# Altium PCB MiniRobot.PcbDoc
Units mm, origin at the board's own origin, x right, y up, seen from the top; angles counter-clockwise.
Board outline 90 x 85 mm, 2 copper layers (Top Layer, Bottom Layer); 54 components, 47 nets, 197 pads, 4 vias.
Unrouted connection lines stored in the file: 115.
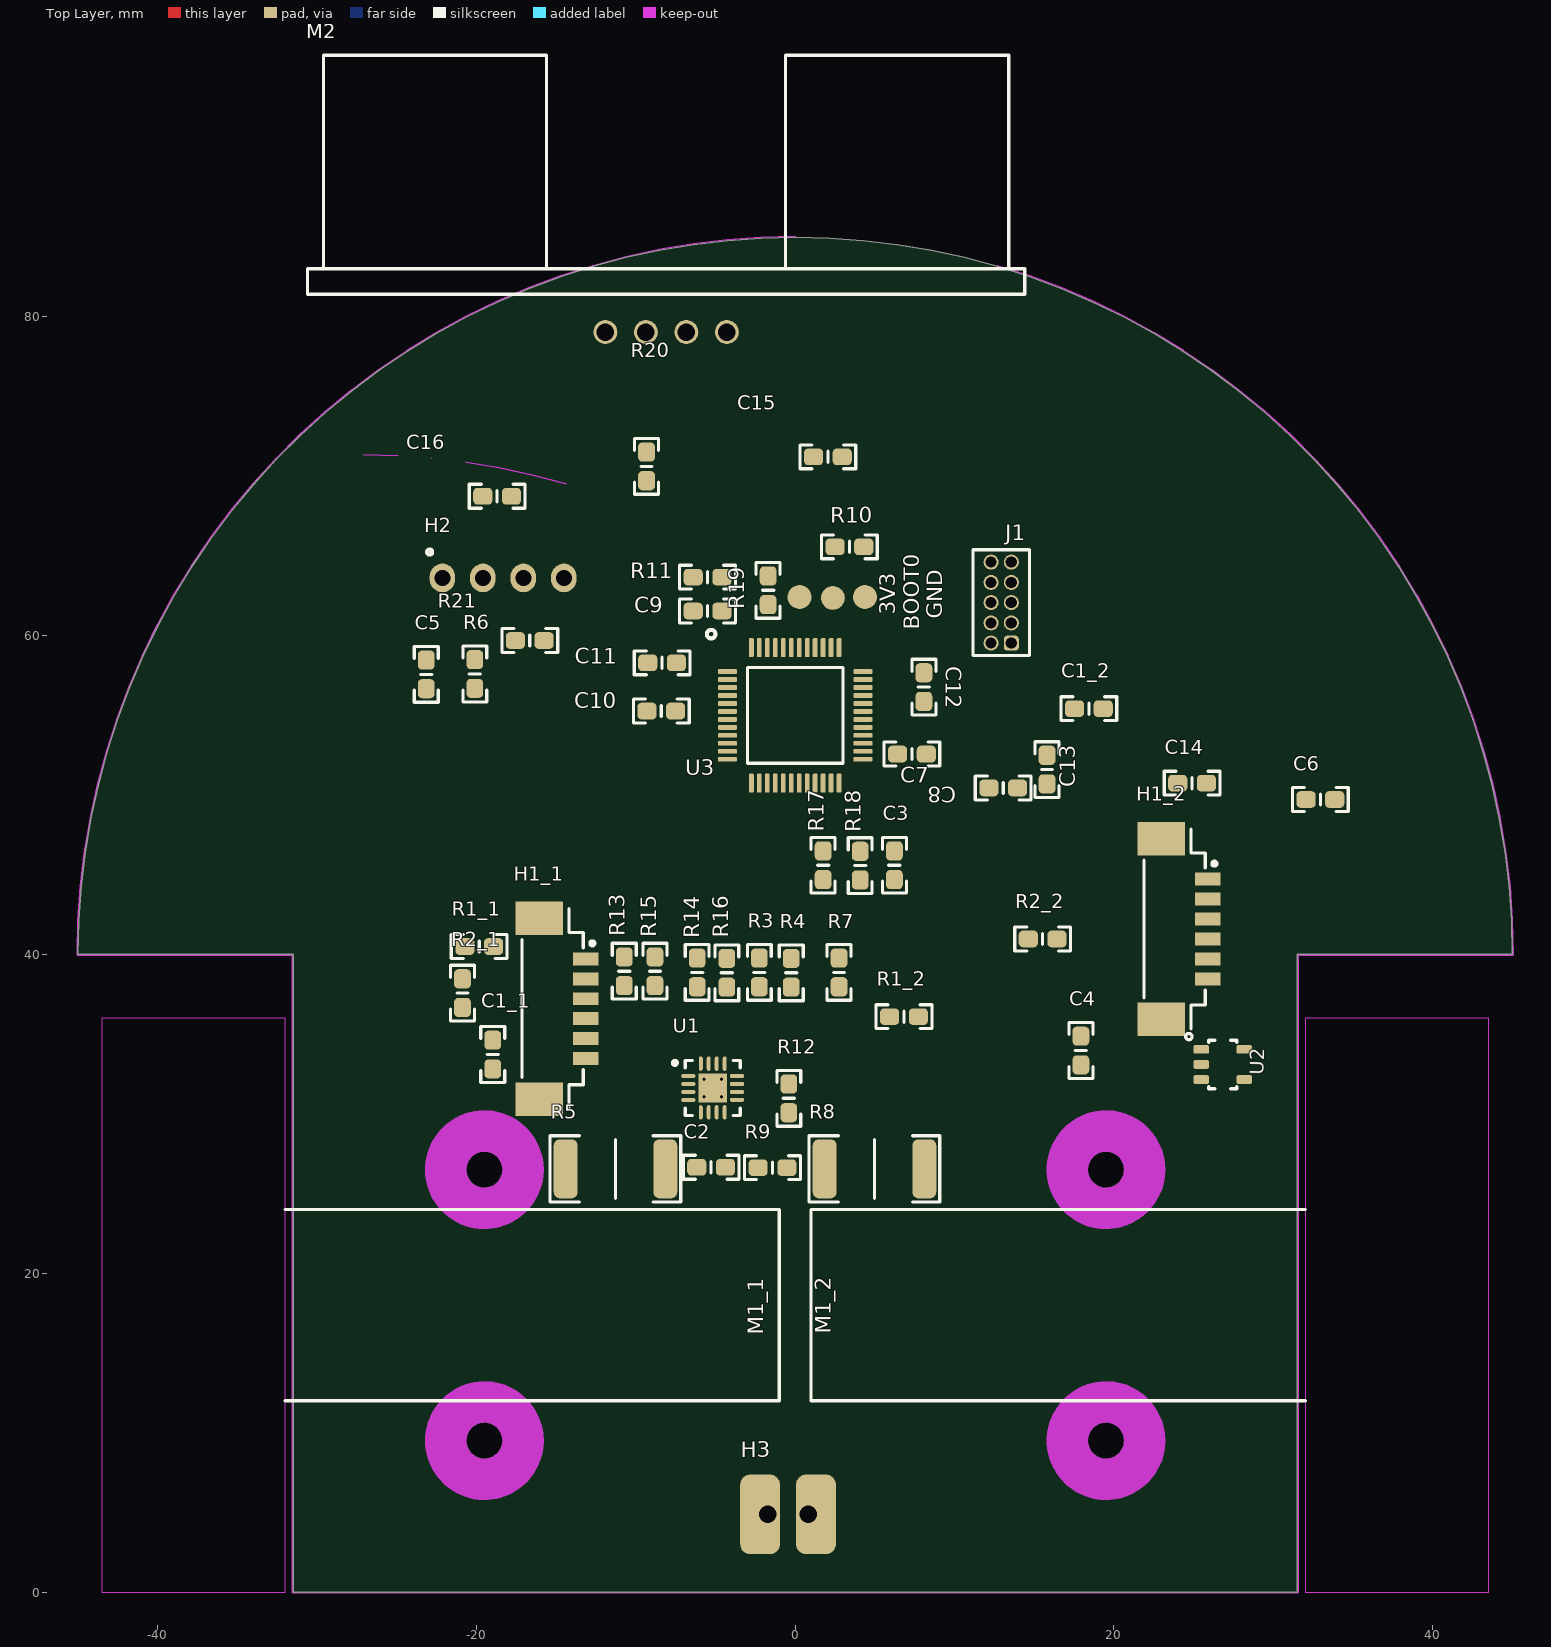
[diagram p0: Top Layer view]
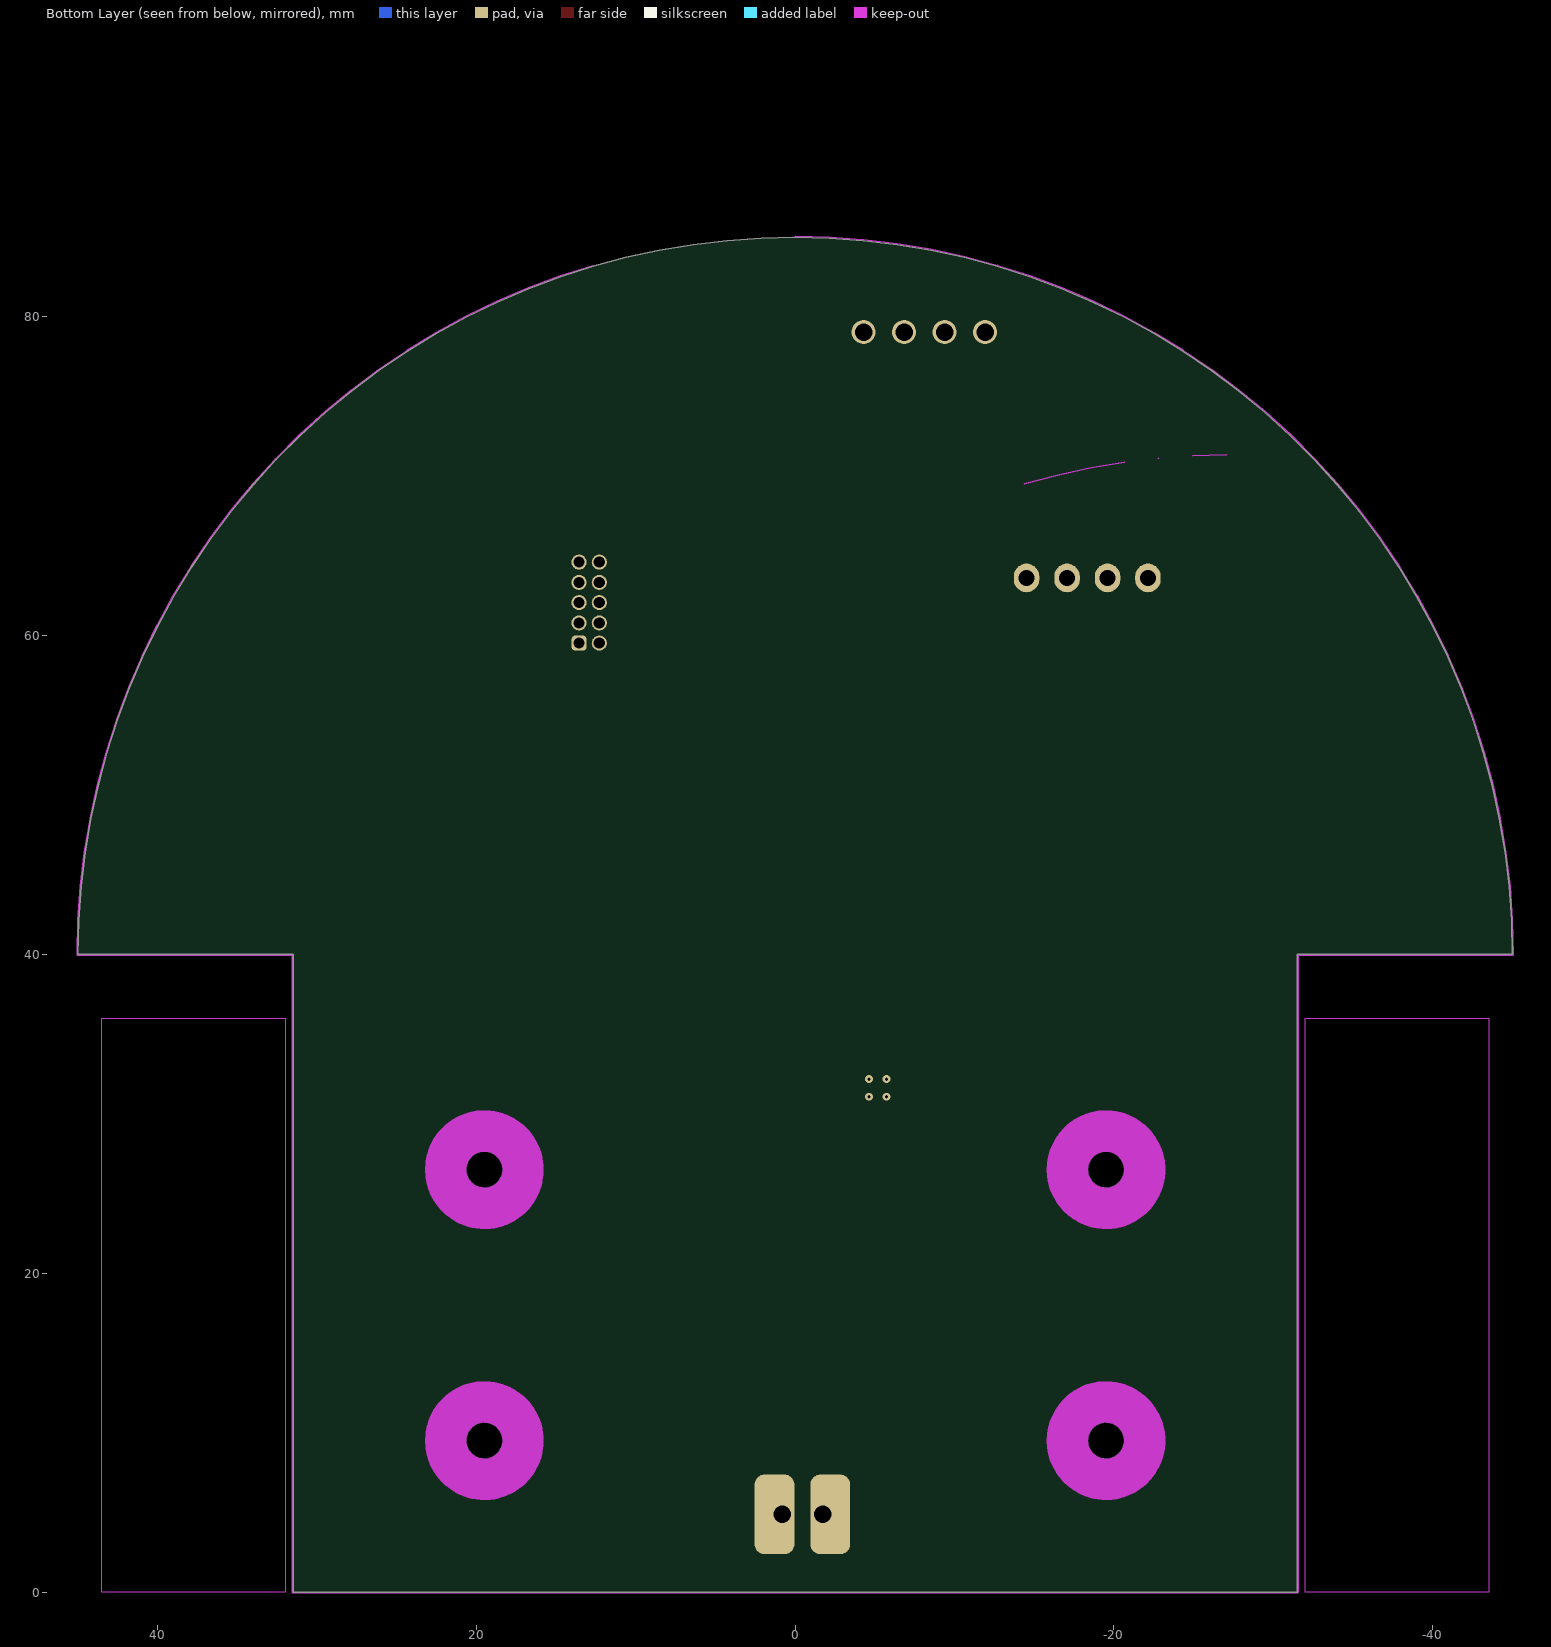
[diagram p1: Bottom Layer view, seen from below]

## Layer stack, top to bottom
Top Solder: solder mask 0.0102, Solder Resist, Dk 3.5
Top Layer: signal copper 0.0356
Dielectric 1: dielectric 0.32, FR-4, Dk 4.8
Bottom Layer: signal copper 0.0356
Bottom Solder: solder mask 0.0102, Solder Resist, Dk 3.5

## Board outline
45,40 44.949,42.141 44.796,44.278 44.542,46.404 44.187,48.516 43.732,50.609 43.177,52.678 42.525,54.718 41.777,56.725 40.933,58.694 39.998,60.62 38.971,62.5 37.856,64.329 36.656,66.103 35.372,67.817 34.009,69.469 32.568,71.054 31.054,72.568 29.469,74.009 27.817,75.372 26.103,76.656 24.329,77.856 22.5,78.971 20.62,79.998 18.694,80.933 16.725,81.777 14.718,82.525 12.678,83.177 10.609,83.732 8.516,84.187 6.404,84.542 4.278,84.796 2.141,84.949 0,85 -2.141,84.949 -4.278,84.796 -6.404,84.542 -8.516,84.187 -10.609,83.732 -12.678,83.177 -14.718,82.525 -16.725,81.777 -18.694,80.933 -20.62,79.998 -22.5,78.971 -24.329,77.856 -26.103,76.656 -27.817,75.372 -29.469,74.009 -31.054,72.568 -32.568,71.054 -34.009,69.469 -35.372,67.817 -36.656,66.103 -37.856,64.329 -38.971,62.5 -39.998,60.62 -40.933,58.694 -41.777,56.725 -42.525,54.718 -43.177,52.678 -43.732,50.609 -44.187,48.516 -44.542,46.404 -44.796,44.278 -44.949,42.141 -45,40 -31.5,40 -31.5,0 31.5,0 31.5,40

## Design rules (kind name [scope] priority, off if disabled: settings)
Clearance [All] p1: gap=0.125
ComponentClearance [All] p1 off: gap=0.254 collisioncheckmode=3 verticalgap=0.254 showdistances=FALSE
HoleSize [All] p1: absolutevalues=TRUE maxlimit=10 minlimit=0.19 maxpercent=80.000 minpercent=20.000
MinimumAnnularRing [All] p1: minimumring=0.076
MinimumSolderMaskSliver [All] p1: minsoldermaskwidth=0.154
PolygonConnect [All] p1: connectstyle=Relief reliefconductorwidth=0.254 reliefentries=4 polygonreliefangle="45 Angle" airgapwidth=0.254
RoutingVias [All] p1: holewidth=0.25 width=0.6 viastyle="Through Hole" minholewidth=0.2 minwidth=0.45 maxholewidth=1 maxwidth=2
SilkToSilkClearance [All] p1: silktosilkclearance=0.154
SilkToSolderMaskClearance [IsPad] p1: minsilkscreentomaskgap=0 clearancetoexposedcopper=TRUE
SolderMaskExpansion SolderMask_Via [IsVia] p1: expansion=-100
SolderMaskExpansion [All] p2: expansion=0.102
Width [All] p1: maxlimit=10 minlimit=0.075 preferedwidth=0.2 minimp=50.000000 maximp=50.000000 favimp=50.000000
24 further rules are at their usual default settings.

## Classes and differential pairs
channel class MR_Motor: LeftMotor RightMotor
component class U_MR_Power: C6 C14 H3 U2
component class RightMotor: C1_2 H1_2 M1_2 R1_2 R2_2
component class LeftMotor: C1_1 H1_1 M1_1 R1_1 R2_1
component class U_MR_Mcu: 3V3 BOOT0 C7 C8 C9 C10 C11 C12 C13 GND J1 R10 R11 R13 R14 R15 R16 R17 R18 R19 U3
component class U_MR_Motor_Control: C2 C3 C4 C5 R3 R4 R5 R6 R7 R8 R9 R12 U1
component class U_MR_RangeSensor: C15 M2 R20
component class U_MR_UartConnector: C16 H2 R21

## Components (designator, comment, footprint, x,y, rotation, side; value= is the part's Value field where it differs from the comment)
3V3 "TestPoint" ROUND_TEST_POINT 0.275,62.425 r180 top
BOOT0 "TestPoint" ROUND_TEST_POINT 2.362,62.375 r270 top
C1_1 "CerCap" 0603_CAP_LD -18.975,33.725 r270 top (schematic designator C1)
C1_2 "CerCap" 0603_CAP_LD 18.425,55.425 r180 top (schematic designator C1)
C2 "CerCap" 0603_CAP_LD -5.275,26.65 r180 top
C3 "CerCap" 0603_CAP_LD 6.225,45.6 r270 top
C4 "CerCap" 0603_CAP_LD 17.925,33.975 r90 top
C5 "CerCap" 0603_CAP_LD -23.15,57.575 r90 top
C6 "CerCap" 0603_CAP_LD 32.95,49.725 r0 top
C7 "CerCap" 0603_CAP_LD 7.325,52.575 r180 top
C8 "CerCap" 0603_CAP_LD 13.05,50.45 r0 top
C9 "CerCap" 0603_CAP_LD -5.5,61.55 r0 top
C10 "CerCap" 0603_CAP_LD -8.4,55.275 r0 top
C11 "CerCap" 0603_CAP_LD -8.35,58.3 r0 top
C12 "CerCap" 0603_CAP_LD 8.075,56.775 r90 top
C13 "CerCap" 0603_CAP_LD 15.8,51.6 r270 top
C14 "CerCap" 0603_CAP_LD 24.9,50.75 r180 top
C15 "CerCap" 0603_CAP_LD 2.05,71.225 r180 top
C16 "CerCap" 0603_CAP_LD -18.7,68.75 r180 top
GND "TestPoint" ROUND_TEST_POINT 4.375,62.425 r90 top
H1_1 "Header" HEADER_1X6_PICOBLADE_653106124022 -15.225,36.6 r270 top (schematic designator H1)
H1_2 "Header" HEADER_1X6_PICOBLADE_653106124022 23.8,41.6 r270 top (schematic designator H1)
H2 "Header" "HE14 1x4 Straight" -18.325,63.625 r0 top
H3 "CustomBatteryConnector" CUSTOMBATTERYCONNECTOR -0.45,4.875 r0 top
J1 "Debug" 62201021121 12.925,62.075 r90 top
M1_1 "MotorGroup" MOTORGROUP -1,18 r0 top locked (schematic designator M1)
M1_2 "MotorGroup" MOTORGROUP 1,18 r180 top locked (schematic designator M1)
M2 "Ultrasonic Range Sensor" HC-SR04 -8.1,79.05 r0 top
R1_1 "Resistor" 0603_RES_LD -19.825,40.5 r0 top (schematic designator R1)
R1_2 "Resistor" 0603_RES_LD 6.825,36.1 r0 top (schematic designator R1)
R2_1 "Resistor" 0603_RES_LD -20.875,37.575 r270 top (schematic designator R2)
R2_2 "Resistor" 0603_RES_LD 15.525,40.975 r0 top (schematic designator R2)
R3 "Resistor" 0603_RES_LD -2.25,38.875 r90 top
R4 "Resistor" 0603_RES_LD -0.25,38.85 r270 top
R5 "Resistor" 2512_RES_LD -11.275,26.55 r180 top
R6 "Resistor" 0603_RES_LD -20.1,57.6 r270 top
R7 "Resistor" 0603_RES_LD 2.75,38.875 r270 top
R8 "Resistor" 2512_RES_LD 4.975,26.55 r180 top
R9 "Resistor" 0603_RES_LD -1.425,26.625 r180 top
R10 "Resistor" 0603_RES_LD 3.4,65.575 r180 top
R11 "Resistor" 0603_RES_LD -5.5,63.675 r0 top
R12 "Resistor" 0603_RES_LD -0.4,30.975 r90 top
R13 "Resistor" 0603_RES_LD -10.725,38.95 r90 top
R14 "Resistor" 0603_RES_LD -6.15,38.875 r90 top
R15 "Resistor" 0603_RES_LD -8.8,38.95 r90 top
R16 "Resistor" 0603_RES_LD -4.29,38.85 r90 top
R17 "Resistor" 0603_RES_LD 1.75,45.6 r90 top
R18 "Resistor" 0603_RES_LD 4.075,45.575 r90 top
R19 "Resistor" 0603_RES_LD -1.7,62.85 r270 top
R20 "Resistor" 0603_RES_LD -9.325,70.625 r90 top
R21 "Resistor" 0603_RES_LD -16.65,59.7 r180 top
U1 "Dual Brush Motor Driver" QFN-STSPIN240 -5.175,31.625 r0 top
U2 "Low noise, Low Iq LDO" LP5907 26.825,33.1 r0 top
U3 "Microcontroller" STM32_LQFP48 0,55 r0 top

## Footprints (in the part's own frame and the unit in brackets; to place one, negate y for a bottom-side part, rotate by r counter-clockwise, add the part's x,y. Pads: shape width x height; smd on the part's side, far side on the other; paste and mask are expansions set on the pad)
0603_CAP_LD [mm] "0603 Capacitor Low Density"
  rrect50% 1.2x1.05 smd: 1(-0.9,0) 2(0.9,0)
  silkscreen extent -1.75,-0.75 1.75,0.75
0603_RES_LD [mm] "0603 Resistor Low Density"
  rrect50% 1.2x1.05 smd: 1(-0.9,0) 2(0.9,0)
  silkscreen extent -1.75,-0.75 1.75,0.75
2512_RES_LD [mm] "2512 Low Density Resistor"
  rrect50% 1.5x3.7 smd: 1(-3.125,0) 2(3.125,0)
  silkscreen extent -4.1,-2.07 4.1,2.07
62201021121 [mm] "Pin Header, pitch 1.27 mm, THT, Vertical, dual row, 10p"
  rrect50% 0.95x0.95 hole 0.7: 1(-2.54,-0.635)
  round 0.95 hole 0.7: 2(-2.54,0.635) 3(-1.27,-0.635) 4(-1.27,0.635) 5(0,-0.635) 6(0,0.635) 7(1.27,-0.635) 8(1.27,0.635) 9(2.54,-0.635) 10(2.54,0.635)
  silkscreen extent -3.32,-1.78 3.32,1.78, body extent -3.17,-1.7 3.18,1.7, height 5.33
CUSTOMBATTERYCONNECTOR [mm] "CustomBatteryConnector"
  rrect50% 2.5x5 smd paste-100: +(-1.75,0) -(1.75,0)
  rrect50% 2.5x5 smd far side paste-100: +(-1.75,0) -(1.75,0)
  round 1.5 hole 1.1 unplated paste-100: +(-1.27,0) -(1.27,0)
HC-SR04 [mm] "HC-SR04"
  round 1.5 hole 1.1 unplated: 1(-3.81,0) 2(-1.27,0) 3(1.27,0) 4(3.81,0)
  silkscreen extent -22.5,2.38 22.5,17.38, body extent -22.73,-0.3 22.72,17.49, height 20
"HE14 1x4 Straight" [mm] "Connector HE14 Straight 1x4"
  oval 1.6x1.8 hole 1 mask+0.102: 1(-3.81,0) 2(-1.27,0) 3(1.27,0) 4(3.81,0)
  silkscreen extent -4.77,1.47 -4.45,1.78, body extent -5.08,-1.27 5.08,1.27, height 9.5
HEADER_1X6_PICOBLADE_653106124022 [mm] "1.25mm SMT Male Vertical Shrouded Header, 6p"
  rect 0.81x1.6 smd: 1(-3.125,2.07) 2(-1.875,2.07) 3(-0.625,2.07) 4(0.625,2.07) 5(1.875,2.07) 6(3.125,2.07)
  rect 2.1x3 smd: ""(-5.675,-0.83) ""(5.675,-0.83)
  silkscreen extent -6.27,-1.92 6.27,2.62
LP5907 [mm] "LP5907 SOT23"
  rrect50% 1x0.55 smd mask+0.102: 1(-1.35,0.95) 2(-1.35,0) 3(-1.35,-0.95) 4(1.35,-0.95) 5(1.35,0.95)
  silkscreen extent -2.33,-1.52 0.88,1.95
MOTORGROUP [mm]
  round 0 hole 2.2 unplated paste+0 mask+0: 21(-18.5,8.5) 22(-18.5,-8.5)
  Keep-Out Layer pour cut-out: -31,-18 -31,18 -42.5,18 -42.5,-18
  Keep-Out Layer circle w2.6: c-18.5,-8.5 r2.425
  Keep-Out Layer circle w2.6: c-18.5,8.5 r2.425
  silkscreen extent -31,-6 0,6
QFN-STSPIN240 [mm] "QFN, 16-Leads, Body 3,00x3,00mm, Pitch 0,50mm, Thermal Pad 1,80x1,80mm, IPC Low Density"
  oval 0.9x0.25 smd: 1(-1.525,0.75) 2(-1.525,0.25) 3(-1.525,-0.25) 4(-1.525,-0.75) 9(1.525,-0.75) 10(1.525,-0.25) 11(1.525,0.25) 12(1.525,0.75)
  oval 0.25x0.9 smd: 5(-0.75,-1.525) 6(-0.25,-1.525) 7(0.25,-1.525) 8(0.75,-1.525) 13(0.75,1.525) 14(0.25,1.525) 15(-0.25,1.525) 16(-0.75,1.525)
  rect 1.8x1.8 smd: 17(0,0)
  silkscreen extent -2.5,-1.73 1.73,1.73
ROUND_TEST_POINT [mm] "Small round test point"
  round 1.5 smd paste-100: 1(0,0)
STM32_LQFP48 [mm]
  rrect50% 1.2x0.3 smd: 1(-4.25,2.75) 2(-4.25,2.25) 3(-4.25,1.75) 4(-4.25,1.25) 5(-4.25,0.75) 6(-4.25,0.25) 7(-4.25,-0.25) 8(-4.25,-0.75) 9(-4.25,-1.25) 10(-4.25,-1.75) 11(-4.25,-2.25) 12(-4.25,-2.75) 25(4.25,-2.75) 26(4.25,-2.25) 27(4.25,-1.75) 28(4.25,-1.25) 29(4.25,-0.75) 30(4.25,-0.25) 31(4.25,0.25) 32(4.25,0.75) 33(4.25,1.25) 34(4.25,1.75) 35(4.25,2.25) 36(4.25,2.75)
  rrect50% 0.3x1.2 smd: 13(-2.75,-4.25) 14(-2.25,-4.25) 15(-1.75,-4.25) 16(-1.25,-4.25) 17(-0.75,-4.25) 18(-0.25,-4.25) 19(0.25,-4.25) 20(0.75,-4.25) 21(1.25,-4.25) 22(1.75,-4.25) 23(2.25,-4.25) 24(2.75,-4.25) 37(2.75,4.25) 38(2.25,4.25) 39(1.75,4.25) 40(1.25,4.25) 41(0.75,4.25) 42(0.25,4.25) 43(-0.25,4.25) 44(-0.75,4.25) 45(-1.25,4.25) 46(-1.75,4.25) 47(-2.25,4.25) 48(-2.75,4.25)
  silkscreen extent -5.54,-3 3,5.37

## Part data
C1_1 C1_2 C2 C3 C4 C5 C6 C7 C8 C9 C10 C11 C12 C13 C14 C15 C16: "Ceramic Capacitor"
H1_1 H1_2: library part Header_6x1, "Header 6x1 Pins"
H2: library part Header_4x1, "Header 4x1 PIns"
H3: library part BatteryConnector, "Custom Battery Connector"
J1: library part Cortex_10x2, "Cortex 10 pins Debug Connector"
M1_1 M1_2: library part Motor
M2: library part HC-SR04
U1: library part STSPIN240, "ST Dual Motor Driver"
U2: library part LP5907, "LP5907 Low Noise Low Iq LDO"
U3: library part STM32F303CBT6, "STM32F303 Microcontroller"

## Via types
v1: diameter 0.5, hole 0.2, Top Layer to Bottom Layer, 4 vias

## Nets (pads, with @x,y where several pads share a name; then routed paths per layer and width w, separated by ;. In a path a pad name is that pad's centre, name@x,y a point inside that pad or via, vN(x,y) a via of type N, cw(c..) or ccw(c..) an arc to the next point about the centre after c; other vN are vias at no path point)
3V3: 3V3.1 C7.2 C8.2 C9.2 C10.2 C11.2 C12.2 C13.2 C15.2 J1.1 M2.4 U3.1 U3.9 U3.24 U3.36 U3.48
BOOT0: BOOT0.1 R10.2 U3.44
GND: C1_1.1 C1_2.1 C2.1 C3.1 C4.1 C5.1 C6.1 C7.1 C8.1 C9.1 C10.1 C11.1 C12.1 C13.1 C14.1 C15.1 C16.1 GND.1 H1_1.2 H1_2.2 H2.2 H3.- J1.3 J1.5 J1.9 M2.1 R5.2 R7.1 R8.1 R10.1 R12.1 U1.7 U2.2 U3.8 U3.23 U3.35 U3.47
NetC2_2: C2.2 R3.1 R17.1 U1.14
NetC4_2: C4.2 R4.2 U1.13 U3.20
NetC5_2: C5.2 R6.1
NetH1_1_1: H1_1.1 U1.3
NetH1_1_3: H1_1.3 R1_1.2
NetH1_1_4: H1_1.4 R2_1.2
NetH1_1_6: H1_1.6 U1.5
NetH1_2_1: H1_2.1 U1.10
NetH1_2_3: H1_2.3 R1_2.2
NetH1_2_4: H1_2.4 R2_2.2
NetH1_2_6: H1_2.6 U1.8
NetH2_3: H2.3 R21.2
NetH2_4: H2.4 R11.1
NetM2_2: M2.2 R20.2
NetM2_3: M2.3 R19.1
NetR1_1_1: R1_1.1 U3.10
NetR1_2_1: R1_2.1 U3.16
NetR2_1_1: R2_1.1 U3.11
NetR2_2_1: R2_2.1 U3.17
NetR4_1: R4.1 R18.1
NetR5_1: R5.1 U1.4
NetR6_2: R6.2 R7.2 U1.12
NetR8_2: R8.2 U1.9
NetR9_1: R9.1 R12.2 U1.11
NetR11_2: R11.2 U3.42
NetR13_1: R13.1 U1.2
NetR13_2: R13.2 U3.12
NetR14_1: R14.1 U1.16
NetR14_2: R14.2 U3.13
NetR15_1: R15.1 U1.1
NetR15_2: R15.2 U3.14
NetR16_1: R16.1 U1.15
NetR16_2: R16.2 U3.15
NetR17_2: R17.2 U3.18
NetR18_2: R18.2 U3.19
NetR19_2: R19.2 U3.46
NetR20_1: R20.1 U3.45
NetR21_1: R21.1 U3.43
nRST: J1.10 U3.7
SWCLK: J1.4 U3.37
SWDIO: J1.2 U3.34
SWO: J1.6 U3.39
VBATT: C1_1.2 C1_2.2 C3.2 C14.2 C16.2 H1_1.5 H1_2.5 H2.1 H3.+ R3.2 R9.2 U1.6 U2.1 U2.3
VCC: C6.2 U2.5
pads on no net: H1_1. H1_2. J1.7 J1.8 M1_1.21 M1_1.22 M1_2.21 M1_2.22 U1.17 U2.4 U3.2 U3.3 U3.4 U3.5 U3.6 U3.21 U3.22 U3.25 U3.26 U3.27 U3.28 U3.29 U3.30 U3.31 U3.32 U3.33 U3.38 U3.40 U3.41
copper on no net:
  other v1: -5.725,31.075 -4.625,31.075 -5.725,32.175 -4.625,32.175

## Keep-outs
Keep-Out Layer:
  lines w0.1: -0.002,85.05 -2.142,84.999 ; 12.693,83.225 14.733,82.573 ; 44.999,42.141 ccw(c44.949,42.141) 44.999,42.142 ; -45.05,40.001 ccw(c-45,40) -45,39.95 ; -45.05,40.002 ccw(c-45,40) -45,39.95 ; -45.05,40.002 -44.999,42.142 ; -45.05,40.001 -45.05,40.002 ; -45,39.95 -31.55,39.95 -31.55,0 ; -44.999,42.142 cw(c-44.949,42.141) -44.999,42.145 ; -44.999,42.142 cw(c-44.949,42.141) -44.999,42.145 ; -44.999,42.142 -44.999,42.142 ; -44.999,42.145 -44.846,44.281 ; -44.846,44.281 cw(c-44.796,44.278) -44.846,44.283 ; -44.846,44.281 cw(c-44.796,44.278) -44.846,44.283 ; -44.846,44.283 -44.592,46.41 ; -44.592,46.41 cw(c-44.542,46.404) -44.591,46.413 ; -44.592,46.41 cw(c-44.542,46.404) -44.591,46.412 ; -44.591,46.413 -44.236,48.524 ; -44.591,46.412 -44.591,46.413 ; -44.236,48.525 cw(c-44.187,48.516) -44.236,48.527 ; -44.236,48.524 cw(c-44.187,48.516) -44.236,48.527 ; -44.236,48.524 -44.236,48.525 ; -44.236,48.527 ccw(c-44.187,48.516) -44.236,48.527 ; -44.236,48.527 -43.78,50.62 ; -44.236,48.527 -44.236,48.527 ; -44.236,48.527 -44.236,48.527 ; -43.78,50.62 cw(c-43.732,50.609) -43.78,50.622 ; -43.78,50.62 ccw(c-43.732,50.609) -43.78,50.62 ; -43.78,50.62 cw(c-43.732,50.609) -43.78,50.622 ; -43.78,50.62 -43.78,50.62 ; -43.78,50.62 -43.78,50.62 ; -43.78,50.622 ccw(c-43.732,50.609) -43.78,50.622 ; -43.78,50.622 -43.226,52.691 ; -43.78,50.622 -43.78,50.622 ; -43.78,50.622 -43.78,50.622 ; -43.226,52.691 cw(c-43.177,52.678) -43.225,52.693 ; -43.226,52.691 ccw(c-43.177,52.678) -43.226,52.691 ; -43.226,52.691 cw(c-43.177,52.678) -43.225,52.693 ; -43.226,52.691 -43.226,52.691 ; -43.226,52.691 -43.226,52.691 ; -43.225,52.693 -42.573,54.733 ; -42.573,54.733 cw(c-42.525,54.718) -42.572,54.735 ; -42.573,54.733 cw(c-42.525,54.718) -42.572,54.736 ; -42.572,54.736 ccw(c-42.525,54.718) -42.572,54.735 ; -42.572,54.736 -41.824,56.742 ; -42.572,54.736 -42.572,54.736 ; -42.572,54.735 -42.572,54.736 ; -41.823,56.742 cw(c-41.777,56.725) -41.823,56.744 ; -41.823,56.742 ccw(c-41.777,56.725) -41.823,56.742 ; -41.823,56.742 cw(c-41.777,56.725) -41.823,56.744 ; -41.823,56.742 -41.823,56.742 ; -41.824,56.742 -41.823,56.742 ; -41.823,56.744 -40.979,58.713 ; -40.979,58.713 cw(c-40.933,58.694) -40.979,58.715 ; -40.979,58.713 cw(c-40.933,58.694) -40.978,58.716 ; -40.979,58.715 cw(c-40.933,58.694) -40.978,58.716 ; -40.979,58.715 -40.978,58.716 ; -40.978,58.716 -40.043,60.642 ; -40.978,58.716 -40.978,58.716 ; -40.043,60.642 cw(c-39.998,60.62) -40.042,60.644 ; -40.043,60.642 cw(c-39.998,60.62) -40.043,60.642 ; -40.043,60.642 -40.043,60.642 ; -40.043,60.642 -40.043,60.642 ; -40.043,60.642 cw(c-39.998,60.62) -40.042,60.644 ; -40.042,60.644 -39.015,62.524 ; -39.015,62.524 cw(c-38.971,62.5) -39.014,62.526 ; -39.015,62.524 cw(c-38.971,62.5) -39.014,62.526 ; -39.014,62.526 -37.899,64.355 ; -37.899,64.355 cw(c-37.856,64.329) -37.898,64.357 ; -37.899,64.355 cw(c-37.856,64.329) -37.898,64.357 ; -37.898,64.357 -36.698,66.13 ; -37.898,64.357 -37.898,64.357 ; -36.697,66.131 cw(c-36.656,66.103) -36.696,66.133 ; -36.698,66.13 cw(c-36.656,66.103) -36.696,66.133 ; -36.698,66.13 -36.697,66.131 ; -36.696,66.133 -35.412,67.847 ; -35.412,67.847 cw(c-35.372,67.817) -35.411,67.849 ; -35.412,67.847 cw(c-35.372,67.817) -35.411,67.849 ; -35.411,67.849 -34.047,69.501 ; -34.047,69.501 cw(c-34.009,69.469) -34.046,69.502 ; -34.047,69.501 cw(c-34.009,69.469) -34.046,69.502 ; -34.046,69.503 ccw(c-34.009,69.469) -34.046,69.502 ; -34.046,69.503 -32.605,71.087 ; -34.046,69.502 -34.046,69.503 ; -34.046,69.502 -34.046,69.502 ; -32.605,71.087 cw(c-32.568,71.054) -32.603,71.089 ; -32.605,71.087 ccw(c-32.568,71.054) -32.605,71.087 ; -32.605,71.087 cw(c-32.568,71.054) -32.603,71.089 ; -32.605,71.087 -32.605,71.087 ; -32.605,71.087 -32.605,71.087 ; -32.603,71.089 -31.089,72.603 ; -31.55,0 ccw(c-31.5,0) -31.5,-0.05 ; -31.55,0 ccw(c-31.5,0) -31.5,-0.05 ; -31.5,-0.05 31.5,-0.05 ; -31.089,72.603 cw(c-31.054,72.568) -31.087,72.605 ; -31.089,72.603 cw(c-31.054,72.568) -31.087,72.605 ; -31.087,72.605 ccw(c-31.054,72.568) -31.087,72.605 ; -31.087,72.605 -29.503,74.046 ; -31.087,72.605 -31.087,72.605 ; -31.087,72.605 -31.087,72.605 ; -29.503,74.046 cw(c-29.469,74.009) -29.502,74.046 ; -29.503,74.046 -29.502,74.046 ; -29.502,74.046 cw(c-29.469,74.009) -29.501,74.047 ; -29.502,74.046 cw(c-29.469,74.009) -29.501,74.047 ; -29.502,74.046 -29.502,74.046 ; -29.501,74.047 -27.849,75.411 ; -27.849,75.411 cw(c-27.817,75.372) -27.847,75.412 ; -27.849,75.411 cw(c-27.817,75.372) -27.847,75.412 ; -27.847,75.412 -26.133,76.696 ; -27.073,71.35 ccw(c-27.075,71.3) -27.076,71.35 -27.077,71.35 cw(c-27.075,71.3) -27.074,71.35 -27.073,71.35 ; -27.073,71.35 -24.933,71.299 ; -26.133,76.696 cw(c-26.103,76.656) -26.13,76.698 ; -26.133,76.696 cw(c-26.103,76.656) -26.131,76.697 -26.13,76.698 ; -26.13,76.698 -24.357,77.898 ; -24.933,71.299 cw(c-24.934,71.249) -24.93,71.299 ccw(c-24.934,71.249) -24.933,71.299 ; -24.933,71.299 -24.933,71.299 ; -24.357,77.898 cw(c-24.329,77.856) -24.355,77.899 ; -24.357,77.898 cw(c-24.329,77.856) -24.355,77.899 ; -24.357,77.898 -24.357,77.898 ; -24.355,77.899 -22.526,79.014 ; -22.526,79.014 cw(c-22.5,78.971) -22.524,79.015 ; -22.526,79.014 cw(c-22.5,78.971) -22.524,79.015 ; -22.524,79.015 -20.644,80.041 ; -20.662,70.891 ccw(c-20.671,70.842) -20.665,70.892 cw(c-20.671,70.842) -20.663,70.891 ; -20.662,70.891 -18.551,70.536 ; -20.663,70.891 -20.662,70.891 ; -20.644,80.041 cw(c-20.62,79.998) -20.642,80.042 ; -20.644,80.041 cw(c-20.62,79.998) -20.642,80.043 ; -20.642,80.042 cw(c-20.62,79.998) -20.642,80.043 ; -20.642,80.043 -20.642,80.043 ; -20.642,80.042 -20.642,80.043 ; -20.642,80.043 -18.716,80.978 ; -18.716,80.978 cw(c-18.694,80.933) -18.713,80.979 ; -18.715,80.979 ccw(c-18.694,80.933) -18.716,80.978 ; -18.715,80.979 cw(c-18.694,80.933) -18.713,80.979 ; -18.716,80.978 -18.715,80.979 ; -18.716,80.978 -18.716,80.978 ; -18.713,80.979 -16.745,81.823 ; -18.55,70.536 cw(c-18.559,70.487) -18.548,70.536 ; -18.551,70.536 cw(c-18.559,70.487) -18.548,70.536 ; -18.551,70.536 -18.55,70.536 ; -18.548,70.536 ccw(c-18.559,70.487) -18.548,70.536 ; -18.548,70.536 -16.455,70.08 ; -18.548,70.536 -18.548,70.536 ; -18.548,70.536 -18.548,70.536 ; -16.745,81.823 cw(c-16.725,81.777) -16.742,81.823 ; -16.745,81.823 cw(c-16.725,81.777) -16.742,81.823 ; -16.742,81.823 cw(c-16.725,81.777) -16.742,81.823 ; -16.742,81.823 -16.742,81.823 ; -16.742,81.823 -16.742,81.823 ; -16.742,81.823 -14.736,82.572 ; -16.455,70.08 cw(c-16.466,70.032) -16.453,70.08 ; -16.455,70.08 ccw(c-16.466,70.032) -16.455,70.08 ; -16.455,70.08 cw(c-16.466,70.032) -16.453,70.08 ; -16.455,70.08 -16.455,70.08 ; -16.455,70.08 -16.455,70.08 ; -16.453,70.08 ccw(c-16.466,70.032) -16.453,70.08 ; -16.453,70.08 -14.384,69.526 ; -16.453,70.08 -16.453,70.08 ; -16.453,70.08 -16.453,70.08 ; -14.736,82.572 cw(c-14.718,82.525) -14.735,82.572 ; -14.736,82.572 -14.736,82.572 ; -14.736,82.572 cw(c-14.718,82.525) -14.733,82.573 ; -14.735,82.572 cw(c-14.718,82.525) -14.733,82.573 ; -14.736,82.572 -14.735,82.572 ; -14.733,82.573 -12.693,83.225 ; -14.384,69.526 cw(c-14.397,69.477) -14.382,69.525 ccw(c-14.397,69.477) -14.384,69.525 ; -14.384,69.525 ccw(c-14.397,69.477) -14.384,69.526 ; -14.384,69.526 -14.384,69.525 ; -14.384,69.526 -14.384,69.526 ; -12.693,83.225 cw(c-12.678,83.177) -12.691,83.225 ; -12.693,83.225 cw(c-12.678,83.177) -12.691,83.226 ; -12.691,83.225 cw(c-12.678,83.177) -12.691,83.226 ; -12.691,83.225 -12.691,83.226 ; -12.691,83.226 -10.622,83.78 ; -12.691,83.226 -12.691,83.226 ; -10.622,83.78 cw(c-10.609,83.732) -10.622,83.78 ; -10.622,83.78 -10.622,83.78 ; -10.622,83.78 cw(c-10.609,83.732) -10.62,83.78 ; -10.622,83.78 cw(c-10.609,83.732) -10.62,83.78 ; -10.622,83.78 -10.622,83.78 ; -10.62,83.78 -8.527,84.236 ; -8.527,84.236 cw(c-8.516,84.187) -8.524,84.236 ; -8.527,84.236 cw(c-8.516,84.187) -8.525,84.236 -8.524,84.236 ; -8.524,84.236 -6.413,84.591 ; -6.412,84.591 cw(c-6.404,84.542) -6.41,84.592 ; -6.413,84.591 cw(c-6.404,84.542) -6.41,84.592 ; -6.413,84.591 -6.412,84.591 ; -6.41,84.592 -4.283,84.846 ; -4.283,84.846 cw(c-4.278,84.796) -4.281,84.846 ; -4.283,84.846 cw(c-4.278,84.796) -4.281,84.846 ; -4.281,84.846 -2.145,84.999 ; -2.145,84.999 cw(c-2.141,84.949) -2.142,84.999 ; -2.145,84.999 cw(c-2.141,84.949) -2.142,84.999 -2.142,84.999 ; 14.733,82.573 cw(c14.718,82.525) 14.735,82.572 ; 14.733,82.573 cw(c14.718,82.525) 14.736,82.572 ; 14.736,82.572 ccw(c14.718,82.525) 14.735,82.572 ; 14.736,82.572 16.742,81.823 ; 14.736,82.572 14.736,82.572 ; 14.735,82.572 14.736,82.572 ; 16.742,81.823 cw(c16.725,81.777) 16.744,81.823 ; 16.742,81.823 ccw(c16.725,81.777) 16.742,81.823 ; 16.742,81.823 cw(c16.725,81.777) 16.744,81.823 ; 16.742,81.823 16.742,81.823 ; 16.742,81.823 16.742,81.823 ; 16.744,81.823 18.713,80.979 ; 18.713,80.979 cw(c18.694,80.933) 18.715,80.979 ; 18.713,80.979 cw(c18.694,80.933) 18.716,80.978 ; 18.716,80.978 ccw(c18.694,80.933) 18.715,80.979 ; 18.716,80.978 20.642,80.043 ; 18.716,80.978 18.716,80.978 ; 18.715,80.979 18.716,80.978 ; 20.642,80.042 ccw(c20.62,79.998) 20.642,80.043 ; 20.642,80.042 cw(c20.62,79.998) 20.644,80.042 ; 20.642,80.042 20.642,80.043 ; 20.642,80.043 cw(c20.62,79.998) 20.644,80.042 ; 20.642,80.043 20.642,80.043 ; 20.644,80.042 22.524,79.015 ; 22.524,79.015 cw(c22.5,78.971) 22.526,79.014 ; 22.524,79.015 cw(c22.5,78.971) 22.526,79.014 ; 22.526,79.014 24.355,77.899 ; 24.355,77.899 cw(c24.329,77.856) 24.357,77.898 ; 24.355,77.899 cw(c24.329,77.856) 24.357,77.898 ; 24.357,77.898 26.13,76.698 ; 24.357,77.898 24.357,77.898 ; 26.13,76.698 cw(c26.103,76.656) 26.133,76.696 ; 26.13,76.698 26.131,76.697 cw(c26.103,76.656) 26.133,76.696 ; 26.133,76.696 27.847,75.412 ; 27.847,75.412 cw(c27.817,75.372) 27.849,75.411 ; 27.847,75.412 cw(c27.817,75.372) 27.849,75.411 ; 27.849,75.411 29.501,74.047 ; 29.501,74.047 cw(c29.469,74.009) 29.502,74.046 ; 29.501,74.047 cw(c29.469,74.009) 29.502,74.046 ; 29.502,74.046 cw(c29.469,74.009) 29.503,74.046 ; 29.502,74.046 29.502,74.046 ; 29.503,74.046 31.087,72.605 ; 29.503,74.046 29.502,74.046 ; 31.087,72.605 cw(c31.054,72.568) 31.087,72.605 ; 31.087,72.605 31.087,72.605 ; 31.087,72.605 cw(c31.054,72.568) 31.089,72.603 ; 31.087,72.605 cw(c31.054,72.568) 31.089,72.603 ; 31.087,72.605 31.087,72.605 ; 31.089,72.603 32.603,71.089 ; 31.5,-0.05 ccw(c31.5,0) 31.55,0 ; 31.5,-0.05 ccw(c31.5,0) 31.55,0 ; 31.55,0 31.55,39.95 45,39.95 ; 32.603,71.089 cw(c32.568,71.054) 32.605,71.087 ; 32.603,71.089 cw(c32.568,71.054) 32.605,71.087 ; 32.605,71.087 ccw(c32.568,71.054) 32.605,71.087 ; 32.605,71.087 32.605,71.087 ; 32.605,71.087 32.605,71.087 ; 32.605,71.087 34.046,69.503 ; 34.046,69.502 cw(c34.009,69.469) 34.047,69.501 ; 34.046,69.502 ccw(c34.009,69.469) 34.046,69.503 ; 34.046,69.502 cw(c34.009,69.469) 34.047,69.501 ; 34.046,69.503 34.046,69.502 ; 34.046,69.502 34.046,69.502 ; 34.047,69.501 35.411,67.849 ; 35.411,67.849 cw(c35.372,67.817) 35.412,67.847 ; 35.411,67.849 cw(c35.372,67.817) 35.412,67.847 ; 35.412,67.847 36.696,66.133 ; 36.696,66.133 cw(c36.656,66.103) 36.698,66.13 ; 36.696,66.133 cw(c36.656,66.103) 36.697,66.131 ; 36.697,66.131 36.698,66.13 ; 36.698,66.13 37.898,64.357 ; 37.898,64.357 cw(c37.856,64.329) 37.899,64.355 ; 37.898,64.357 cw(c37.856,64.329) 37.899,64.355 ; 37.898,64.357 37.898,64.357 ; 37.899,64.355 39.014,62.526 ; 39.014,62.526 cw(c38.971,62.5) 39.015,62.524 ; 39.014,62.526 cw(c38.971,62.5) 39.015,62.524 ; 39.015,62.524 40.041,60.644 ; 40.041,60.644 cw(c39.998,60.62) 40.042,60.642 ; 40.041,60.644 cw(c39.998,60.62) 40.043,60.642 ; 40.043,60.642 ccw(c39.998,60.62) 40.042,60.642 ; 40.043,60.642 40.042,60.642 ; 40.043,60.642 40.043,60.642 ; 40.043,60.642 40.978,58.716 ; 40.979,58.715 ccw(c40.933,58.694) 40.978,58.716 ; 40.979,58.715 cw(c40.933,58.694) 40.979,58.713 ; 40.979,58.715 40.978,58.716 ; 40.978,58.716 cw(c40.933,58.694) 40.979,58.713 ; 40.978,58.716 40.978,58.716 ; 40.979,58.713 41.823,56.745 ; 41.823,56.742 ccw(c41.777,56.725) 41.823,56.745 ; 41.823,56.742 ccw(c41.777,56.725) 41.823,56.742 ; 41.823,56.742 ccw(c41.777,56.725) 41.823,56.745 ; 41.823,56.742 41.823,56.742 ; 41.823,56.742 41.823,56.742 ; 41.823,56.742 42.572,54.736 ; 42.573,54.733 ccw(c42.525,54.718) 42.572,54.736 ; 42.573,54.733 ccw(c42.525,54.718) 42.572,54.735 ; 42.573,54.733 43.225,52.693 ; 42.572,54.735 ccw(c42.525,54.718) 42.572,54.736 ; 42.572,54.736 42.572,54.736 ; 42.572,54.736 42.572,54.735 ; 43.225,52.691 ccw(c43.177,52.678) 43.225,52.693 ; 43.226,52.691 ccw(c43.177,52.678) 43.225,52.691 ; 43.226,52.691 ccw(c43.177,52.678) 43.225,52.693 ; 43.225,52.691 43.226,52.691 ; 43.226,52.691 43.226,52.691 ; 43.226,52.691 43.78,50.622 ; 43.78,50.62 ccw(c43.732,50.609) 43.78,50.622 ; 43.78,50.62 ccw(c43.732,50.609) 43.78,50.62 ; 43.78,50.62 ccw(c43.732,50.609) 43.78,50.622 ; 43.78,50.62 43.78,50.62 ; 43.78,50.62 43.78,50.62 ; 43.78,50.62 44.236,48.527 ; 43.78,50.622 ccw(c43.732,50.609) 43.78,50.622 ; 43.78,50.622 43.78,50.622 ; 43.78,50.622 43.78,50.622 ; 44.236,48.524 ccw(c44.187,48.516) 44.236,48.527 ; 44.236,48.525 ccw(c44.187,48.516) 44.236,48.527 ; 44.236,48.525 44.236,48.524 ; 44.236,48.524 44.591,46.413 ; 44.236,48.527 ccw(c44.187,48.516) 44.236,48.527 ; 44.236,48.527 44.236,48.527 ; 44.236,48.527 44.236,48.527 ; 44.592,46.41 ccw(c44.542,46.404) 44.591,46.412 ; 44.592,46.41 ccw(c44.542,46.404) 44.591,46.413 ; 44.592,46.41 44.846,44.283 ; 44.591,46.413 44.591,46.412 ; 44.846,44.281 ccw(c44.796,44.278) 44.846,44.283 ; 44.846,44.281 ccw(c44.796,44.278) 44.846,44.283 ; 44.846,44.281 44.999,42.145 ; 45,39.95 ccw(c45,40) 45.05,40 ; 45,39.95 ccw(c45,40) 45.05,40 ; 44.999,42.142 ccw(c44.949,42.141) 44.999,42.145 ; 44.999,42.142 ccw(c44.949,42.141) 44.999,42.145 ; 44.999,42.142 44.999,42.142 ; 44.999,42.142 45.05,40.002 ; 45.05,40 ccw(c45,40) 45.05,40.001 ; 45.05,40 ccw(c45,40) 45.05,40.002 ; 45.05,40.002 45.05,40.001 ; -22.794,71.146 cw(c-22.797,71.096) -22.792,71.146 ccw(c-22.797,71.096) -22.794,71.146

## Silkscreen, mask and mechanical layers (free items; w line width, h text height)
Mechanical 1:
  the board outline again, w0.1